# Altium PCB RLC测试仪.PCBDOC
Units mil, origin at the board's own origin, x right, y up, seen from the top; angles counter-clockwise.
Board outline 6000 x 4000 mil, 2 copper layers (Top Layer, Bottom Layer); 44 components, 55 nets, 276 pads, 0 vias.
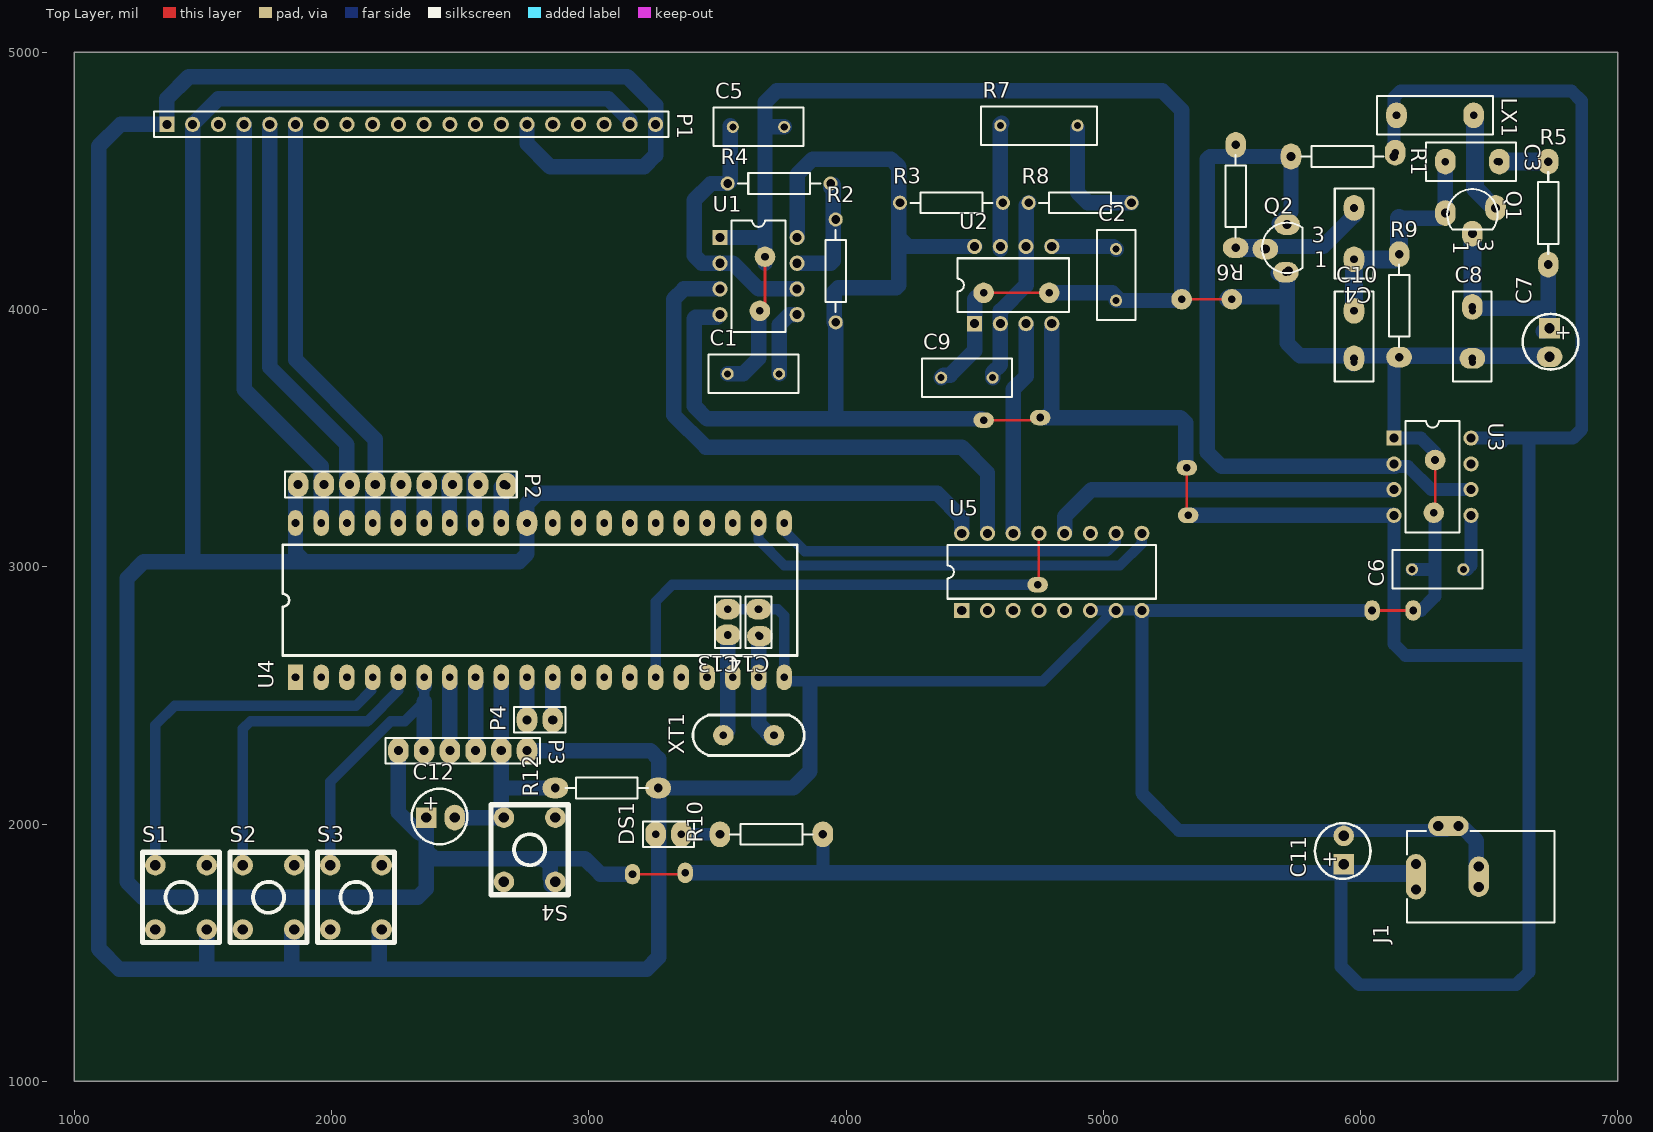
[diagram p0: Top Layer view]
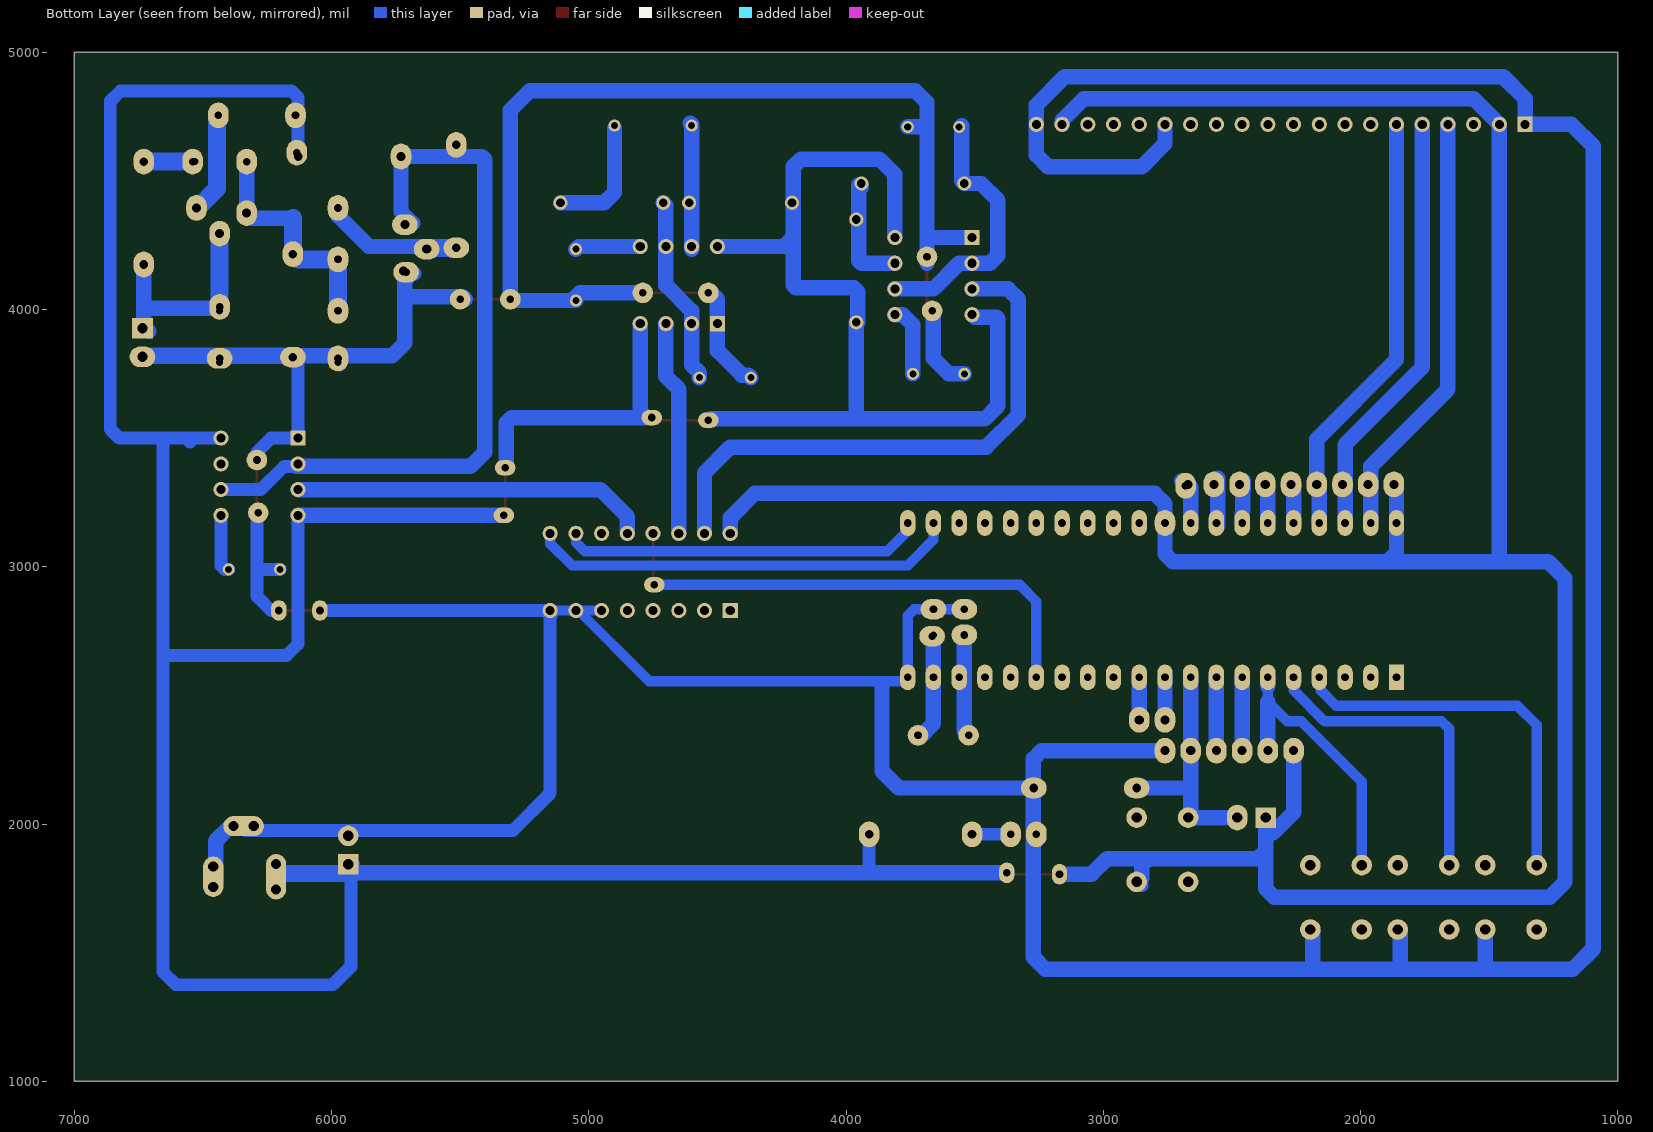
[diagram p1: Bottom Layer view, seen from below]

## Layer stack, top to bottom
Top Solder: solder mask 0.4, Solder Resist, Dk 3.5
Top Layer: signal copper 1.4
Dielectric1: dielectric 12.6, FR-4, Dk 4.8
Bottom Layer: signal copper 1.4
Bottom Solder: solder mask 0.4, Solder Resist, Dk 3.5

## Board outline
1000,1000 7000,1000 7000,5000 1000,5000

## Design rules (kind name [scope] priority, off if disabled: settings)
Clearance [All] p1: gap=10 ignorepadtopadclearanceinfootprint=FALSE except(0: Arc-Hole Track-Hole SMDPad-Hole THPad-Hole Via-Hole Fill-Hole Poly-Hole Region-Hole Text-Hole)
FabricationTestPointUsage TestPointUsage [All] p1: valid=0 allowmultiple=FALSE
FabricationTestpoint Testpoint [All] p1: side=3 testpointundercomponent=TRUE minsize=40 maxsize=100 preferedsize=60 minholesize=0 maxholesize=40 preferedholesize=32 testpointgrid=1 allowsidetop=TRUE allowsidebottom=TRUE usegrid=TRUE gridtolerance=0.01
PolygonConnect [All] p1: connectstyle=Relief reliefconductorwidth=10 reliefentries=4 polygonreliefangle="90 Angle" airgapwidth=10
RoutingVias [All] p1: holewidth=28 width=50 viastyle="Through Hole" minholewidth=28 minwidth=50 maxholewidth=28 maxwidth=50
SolderMaskExpansion [All] p1: expansion=4
Width [All] p1: maxlimit=100 minlimit=10 preferedwidth=50 toplayer_prefwidth=10 minimp=50.000000 maximp=50.000000 favimp=50.000000
28 further rules are at their usual default settings.

## Classes and differential pairs
component class RLC测试仪: C3 C4 C6 C7 C8 C10 C11 C12 C13 C14 DS1 DS2 J1 LX1 P1 P2 P3 P4 Q1 Q2 R1 R5 R6 R8 R9 R10 R11 R12 S1 S3 S4 U2 U3 U4 U5 XT1

## Components (designator, comment, footprint, x,y, rotation, side; value= is the part's Value field where it differs from the comment)
C1 "Cap" RAD-0.2 3640,3750 r180 top
C2 "Cap" RAD-0.2 5050,4135 r270 top
C3 "Cap" RAD-0.2 6430,4575 r0 top
C4 "Cap" RAD-0.2 5975,4295 r270 top
C5 "Cap" RAD-0.2 3660,4710 r180 top
C6 "Cap" RAD-0.2 6300,2990 r180 top
C7 "Cap Pol1" 电容 6715,3875 r270 top
C8 "Cap" RAD-0.2 6435,3895 r90 top
C9 "Cap" RAD-0.2 4470,3735 r0 top
C10 "Cap" RAD-0.2 5975,3895 r90 top
C11 "Cap Pol1" 电容 5955,1895 r90 top
C12 "Cap Pol1" 电容 2420,2005 r0 top
C13 "Cap" RAD-0.1 3540,2785 r270 top
C14 "Cap" RAD-0.1 3660,2785 r270 top
DS1 "LED0" RAD-0.1 3310,1960 r180 top
J1 "PWR2.5" KLD-0202 6755,1795 r180 top
LX1 "Inductor" RAD-0.3 6290,4755 r0 top
P1 "12864" HDR1X20 1360,4720 r0 top
P2 "Header 9" HDR1X9 1870,3320 r0 top
P3 "Header 6H" HDR1X6 2260,2285 r0 top
P4 "Header 2" HDR1X2 2860,2405 r180 top
Q1 "2N3904" BCY-W3/E4#1 6435,4370 r270 top
Q2 "2N3904" BCY-W3/E4#2 5715,4240 r0 top
R1 "Res2" AXIAL-0.4 5930,4595 r0 top
R2 "Res2" AXIAL-0.4 3960,4150 r270 top
R3 "Res2" AXIAL-0.4 4410,4415 r180 top
R4 "Res2" AXIAL-0.4 3740,4490 r0 top
R5 "Res2" AXIAL-0.4 6730,4375 r90 top
R6 "Res2" AXIAL-0.4 5515,4440 r270 top
R7 "Res2" RAD-0.3 4750,4715 r180 top
R8 "Res2" AXIAL-0.4 4910,4415 r180 top
R9 "Res2" AXIAL-0.4 6150,4015 r90 top
R10 "Res2" AXIAL-0.4 3710,1960 r180 top
R12 "Res2" AXIAL-0.4 3070,2140 r180 top
S1 "SW-PB" 点动按键 1145,2000 r180 top
S2 "SW-PB" 点动按键 1485,2000 r180 top
S3 "SW-PB" 点动按键 1825,2000 r180 top
S4 "SW-PB" 点动按键 2500,2185 r180 top
U1 "NE555N" DIP8 3660,4130 r270 top
U2 "NE555N" DIP8 4650,4095 r0 top
U3 "NE555N" DIP8 6280,3350 r270 top
U4 "STC89C52" AT89S52 1860,2570 r90 top
U5 "M74HC4052B1R" DIP16 4800,2980 r0 top
XT1 "12M" 圆晶振 3720,2345 r180 top

## Footprints (in the part's own frame and the unit in brackets; to place one, negate y for a bottom-side part, rotate by r counter-clockwise, add the part's x,y. Pads: shape width x height; smd on the part's side, far side on the other; paste and mask are expansions set on the pad)
AT89S52 [mil]
  rect 100x60 hole 30: 1(0,0)
  oval 100x60 hole 30: 2(0,-100) 3(0,-200) 4(0,-300) 5(0,-400) 6(0,-500) 7(0,-600) 8(0,-700) 9(0,-800) 10(0,-900) 11(0,-1000) 12(0,-1100) 13(0,-1200) 14(0,-1300) 15(0,-1400) 16(0,-1500) 17(0,-1600) 18(0,-1700) 19(0,-1800) 20(0,-1900) 21(600,-1900) 22(600,-1800) 23(600,-1700) 24(600,-1600) 25(600,-1500) 26(600,-1400) 27(600,-1300) 28(600,-1200) 29(600,-1100) 30(600,-1000) 31(600,-900) 32(600,-800) 33(600,-700) 34(600,-600) 35(600,-500) 36(600,-400) 37(600,-300) 38(600,-200) 39(600,-100) 40(600,0)
  silkscreen extent 85,-1950 515,50
AXIAL-0.4 [mm] "Resistor; 2 Leads"
  round 1.4 hole 0.85: 1(-5.08,0) 2(5.08,0)
  silkscreen extent -4.06,-1.02 4.06,1.02
BCY-W3/E4#1 [mm] "TO, Flat Index; 3 In-Line, Axial Leads; Body Dia. 4.7mm"
  oval 2x1 hole 0.9: 1(-0.127,-2.667) 2(1.905,0) 3(-0.635,2.286)
  silkscreen extent -2.48,-2.48 1.5,2.48
BCY-W3/E4#2 [mm] "TO, Flat Index; 3 In-Line, Axial Leads; Body Dia. 4.7mm"
  oval 2x1 hole 0.9: 1(0.127,-2.286) 2(-2.159,-0.127) 3(0,2.286)
  silkscreen extent -2.48,-2.48 1.5,2.48
DIP8 [mm] "DIP; 8 Leads; Row Spacing 7.62 mm; Pitch 2.54 mm"
  rect 1.5x1.5 hole 0.9: 1(-3.81,-3.81)
  round 1.5 hole 0.9: 2(-1.27,-3.81) 3(1.27,-3.81) 4(3.81,-3.81) 5(3.81,3.81) 6(1.27,3.81) 7(-1.27,3.81) 8(-3.81,3.81)
  silkscreen extent -5.5,-2.65 5.5,2.65
DIP16 [mm] "DIP; 16 Leads; Row Spacing 7.62 mm; Pitch 2.54 mm"
  rect 1.5x1.5 hole 0.9: 1(-8.89,-3.81)
  round 1.5 hole 0.9: 2(-6.35,-3.81) 3(-3.81,-3.81) 4(-1.27,-3.81) 5(1.27,-3.81) 6(3.81,-3.81) 7(6.35,-3.81) 8(8.89,-3.81) 9(8.89,3.81) 10(6.35,3.81) 11(3.81,3.81) 12(1.27,3.81) 13(-1.27,3.81) 14(-3.81,3.81) 15(-6.35,3.81) 16(-8.89,3.81)
  silkscreen extent -10.3,-2.65 10.3,2.65
HDR1X2 [mm] "Connector; Header; 2 Position"
  rect 1.5x1.5 hole 0.9: 1(0,0)
  round 1.5 hole 0.9: 2(2.54,0)
  silkscreen extent -1.27,-1.27 3.81,1.27
HDR1X6 [mm] "Connector; Header; 6 Position"
  rect 1.5x1.5 hole 0.9: 1(0,0)
  round 1.5 hole 0.9: 2(2.54,0) 3(5.08,0) 4(7.62,0) 5(10.16,0) 6(12.7,0)
  silkscreen extent -1.27,-1.27 13.97,1.27
HDR1X9 [mm] "Connector; Header; 9 Position"
  rect 1.5x1.5 hole 0.9: 1(0,0)
  round 1.5 hole 0.9: 2(2.54,0) 3(5.08,0) 4(7.62,0) 5(10.16,0) 6(12.7,0) 7(15.24,0) 8(17.78,0) 9(20.32,0)
  silkscreen extent -1.27,-1.27 21.59,1.27
HDR1X20 [mm] "Connector; Header; 20 Position"
  rect 1.5x1.5 hole 0.9: 1(0,0)
  round 1.5 hole 0.9: 2(2.54,0) 3(5.08,0) 4(7.62,0) 5(10.16,0) 6(12.7,0) 7(15.24,0) 8(17.78,0) 9(20.32,0) 10(22.86,0) 11(25.4,0) 12(27.94,0) 13(30.48,0) 14(33.02,0) 15(35.56,0) 16(38.1,0) 17(40.64,0) 18(43.18,0) 19(45.72,0) 20(48.26,0)
  silkscreen extent -1.27,-1.27 49.53,1.27
KLD-0202 [mm] "DC Power Jack, 2.5mm, KLD Series, PCB Mount"
  oval 2x4.5 all layers, no hole: 1(13.7,0)
  round 1.5 hole 1: 1A(13.7,-1.25) 1B(13.7,1.25) 2A(7.5,-1) 2B(7.5,1) 3A(9.5,-5) 3B(11.5,-5)
  oval 2x4 all layers, no hole: 2(7.5,0)
  oval 4x2 all layers, no hole: 3(10.5,-5)
  silkscreen extent 0,-4.5 14.6,4.5
RAD-0.1 [mm] "Indicating Instrument; 2 Leads"
  round 1.2 hole 0.7: 1(-1.27,0) 2(1.27,0)
  silkscreen extent -2.54,-1.27 2.54,1.27
RAD-0.2 [mm] "Jumper Wire; 2 Leads"
  round 1.2 hole 0.7: 1(-2.54,0) 2(2.54,0)
  silkscreen extent -4.44,-1.91 4.44,1.91
RAD-0.3 [mm] "Capacitor; 2 Leads"
  round 1.2 hole 0.7: 1(-3.81,0) 2(3.81,0)
  silkscreen extent -5.71,-1.91 5.71,1.91
圆晶振 [mil]
  round 80 hole 30: 1(0,0) 2(196.85,0)
  silkscreen extent -118,-79 315,79
点动按键 [mil]
  round 80 hole 40: 1(-370,410) 2(-170,160) 3(-370,160) 4(-170,410)
  silkscreen extent -420,110 -120,460
电容 [mil]
  rect 80x80 hole 40: 1(-52,20)
  round 80 hole 40: 2(59,20)
  silkscreen extent -108,-84 108,132

## Part data
C1 C2 C3 C4 C5 C6 C8 C9 C10 C13 C14: "Capacitor"
C7 C11 C12: "Polarized Capacitor (Radial)"
DS1: "Typical INFRARED GaAs LED"
J1: "Low Voltage Power Supply Connector"
P2: "Header, 9-Pin"
P3: "Header, 6-Pin, Right Angle"
P4: "Header, 2-Pin"
Q1 Q2: "NPN General Purpose Amplifier"
R1 R2 R3 R4 R5 R6 R7 R8 R9 R10 R12: "Resistor"
S1 S2 S3 S4: "Switch"
U1 U2 U3: "General-Purpose Single Bipolar Timer"
U4: library part AT89S52
U5: "Analog Multiplexer/Demultiplexer Dual 4-Channel"
XT1: library part XTAL2

## Free pads (board coordinates)
  round 80 hole 30: 0(4535,4065) 1(4790,4065) 2(5305,4040) 3(5500,4040) 4(3685,4205) 5(3665,3995) 6(6290,3415) 7(6285,3210)
  oval 80x100 hole 30: 3(3260,1960) 4(3360,1960) 5(3510,1960) 6(3910,1960) 11(6730,4175) 12(6435,4010) 13(6435,4295) 14(6330,4375) 15(6525,4395) 16(6540,4575) 17(6730,4575) 18(6440,4755) 19(6140,4755) 20(6135,4610) 21(6330,4575) 22(6150,4215) 23(5975,3995) 24(5975,4195) 25(5975,4395) 26(5730,4595) 27(5515,4640) 36(5975,3810) 42(1870,3320) 43(1970,3320) 44(2070,3320) 45(2170,3320) 46(2270,3320) 47(2370,3320) 48(2470,3320) 49(2470,3320) 50(2570,3320) 51(2680,3315) 52(2760,3170) 59(2760,2285) 60(2660,2285) 61(2760,2405) 62(2860,2405) 63(2560,2285) 64(2460,2285) 65(2360,2285) 66(2260,2285) 68(2479,2025)
  oval 80x60 hole 30: 8(4745,2930) 9(4535,3570) 10(4755,3580) 11(5325,3385) 12(5330,3200)
  oval 100x80 hole 30: 9(6435,3810) 10(6735,3816) 28(5715,4330) 29(5630,4235) 30(5515,4240) 31(5710,4145) 35(6150,3815) 53(3540,2835) 54(3660,2835) 55(3540,2735) 56(3665,2730) 57(3270,2140) 58(2870,2140)
  oval 60x80 hole 30: 13(3170,1805) 14(3375,1810) 15(6045,2830) 16(6205,2830)

## Nets (pads, with @x,y where several pads share a name; then routed paths per layer and width w, separated by ;. In a path a pad name is that pad's centre, name@x,y a point inside that pad or via, vN(x,y) a via of type N, cw(c..) or ccw(c..) an arc to the next point about the centre after c; other vN are vias at no path point)
ALE: U4.30
FC: U1.3 U5.15 | length 2194.8
  Bottom Layer w60: U1.3 3370,4080 3330,4040 3330,3590 3455,3465 4450,3465 4550,3365 U5.15
FL: U3.3 U5.12 | length 1388.5
  Bottom Layer w60: U5.12 4850,3195 4955,3300 U3.3
FR: U2.3 U5.14 | length 835.7
  Bottom Layer w60: U5.14 4650,3690 4700,3740 U2.3
GND: C1.2 C2.2 C5.1 C6.2 C7.2 C8.1 C9.1 C10.1 C11.2 C13.1 C14.1 DS1.2 J1.2 J1.2A J1.2B J1.3 J1.3A J1.3B P1.1 P1.15 P1.20 P3.6 pad.0 pad.1 pad.2 pad.3 pad.4@3685,4205 pad.5@3665,3995 pad.6@6290,3415 pad.7 pad.9@6435,3810 pad.10@6735,3816 pad.15@6045,2830 pad.16@6205,2830 pad.31 pad.35 pad.36 pad.53 pad.54 pad.57 pad.59 Q2.1 R9.1 R12.1 S1.1 S2.1 S3.1 U1.1 U2.1 U3.1 U4.20 U5.6 U5.7 U5.8 | length 24580
  Top Layer w10: pad.5@3665,3995 3685,4015 pad.4@3685,4205 ; pad.0 pad.1 ; pad.2 pad.3@5500,4040 ; pad.15@6045,2830 pad.16@6185,2830 ; pad.7@6290,3215 pad.6@6290,3415
  Bottom Layer w40: pad.53 pad.54 3735,2835 3760,2810 U4.20 ; U4.20@3760,2555 4765,2555 U5.7@5040,2830 ; U5.6 U5.7@5040,2830 ; U5.8 U5.7 U5.7@5040,2830
  Bottom Layer w50: U5.8@5150,2815 5150,2120 5295,1975 J1.3@6335,1975 ; U5.8 pad.15@6045,2830 ; pad.35@6140,3805 6130,3795 U3.1 6235,3500 6290,3445 6290,3415 pad.6@6290,3410 ; C6.2 6275,2990 6290,3005 ; pad.16@6205,2830 6235,2830 6290,2885 6290,3005 ; pad.7@6290,3215 6290,3005
  Bottom Layer w60: 1515,1465 S1.1 ; 1845,1460 S2.1@1845,1585 ; S2.1@1855,1585 S2.1 ; 2185,1460 S3.1@2185,1585 ; pad.59 3240,2285 3271.89,2253.11 DS1.2@3271.89,1971.89 ; P1.15 2760,4645 2850,4555 3215,4555 3260,4600 P1.20 3260,4795 3150,4905 1445,4905 1360,4820 P1.1 1180,4720 1095,4635 1095,1515 1175,1435 3225,1435 3271.89,1481.89 DS1.2@3271.89,1971.89 ; DS1.2 DS1.2@3271.89,1971.89 ; pad.57@3280,2140 3795,2140 3860,2205 3860,2535 ; U1.1 3675,4280 3685,4290 ; C1.2 3600,3750 3660,3810 pad.5@3660,3990 ; pad.4@3685,4180 3685,4205 3685,4290 ; C5.1 3690,4710 3685,4705 ; C9.1 4380,3745 4405,3745 4500,3840 U2.1 4500,4040 4525,4065 pad.0 ; pad.1@4785,4065 pad.1 5035,4065 5050,4050 C2.2 5315,4035 5305,4045 5305,4775 5230,4850 3730,4850 3685,4805 3685,4705 ; U5.8@5150,2815 U5.8 ; pad.3@5480,4040 5490,4050 5715,4050 ; pad.31@5680,4140 5709.41,4147.35 Q2.1 ; pad.31@5710,4115 5715,4110 5715,4050 ; pad.36@5970,3790 C10.1 ; pad.35@6190,3820 5990,3820 5765,3820 5715,3870 5715,4050 ; J1.3@6400,1985 6450,1935 J1.2@6450,1785 ; 3685,4290 3685,4705
  Bottom Layer w65: pad.35@6190,3820 6735,3820 pad.10@6745,3820
  Bottom Layer w70: pad.36@5980,3810 pad.36@5990,3820
NetC1_1: C1.1 U1.5 | length 276.6
  Bottom Layer w60: C1.1 3740,3940 3780,3980 U1.5
NetC2_1: C2.1 U2.5 | length 254.1
  Bottom Layer w60: U2.5 5040,4245 C2.1
NetC3_1: C3.1 C4.2 C10.2 pad.14@6330,4375 pad.21 pad.22 pad.23 pad.24 Q1.1 R9.2 | length 901.6
  Bottom Layer w60: 6160,4355 6310,4355 Q1.1 pad.21
  Bottom Layer w70: pad.23 pad.24 6130,4195 pad.22 6150,4355
NetC3_2: C3.2 pad.16@6540,4575 pad.17 R5.2 | length 345
  Bottom Layer w60: pad.16@6550,4575 pad.17@6715,4575
  Bottom Layer w70: pad.16@6550,4575 pad.17
NetC4_1: C4.1 pad.25 pad.29 pad.30 Q2.2 R6.2 | length 663.8
  Bottom Layer w60: pad.29@5655,4235 5525,4235 5535,4245 5855,4245 5975,4365 pad.25
NetC5_2: C5.2 R4.1 U1.2 U1.6 | length 1054.9
  Bottom Layer w60: C5.2@3550,4715 3550,4500 R4.1 3475,4490 3410,4425 3410,4210 3440,4180 3560,4180 3660,4080 U1.6
NetC6_1: C6.1 U3.5 | length 231.2
  Bottom Layer w50: C6.1 6415,2990 6430,3005 U3.5
NetC7_1: C7.1 C8.2 pad.11@6730,4175 pad.12@6435,4010 pad.13@6435,4295 Q1.2 R5.1 | length 852.4
  Bottom Layer w60: pad.12@6440,4005 6725,4005 6730,4010 ; C7.1@6710,3915 6730,3935 R5.1
  Bottom Layer w70: Q1.2 6435,4010 pad.12@6440,4005
NetC9_2: C9.2 R8.2 U2.2 U2.6 | length 738
  Bottom Layer w60: C9.2 4570,3755 4600,3785 4600,3995 4700,4095 4700,4405 R8.2
NetDS1_1: DS1.1 pad.4@3360,1960 pad.5@3510,1960 R10.2 | length 150
  Bottom Layer w50: DS1.1 R10.2
NetDS2_1: 
NetLX1_2: LX1.2 pad.15@6525,4395 pad.18 Q1.3 | length 398.1
  Bottom Layer w70: pad.18 6445,4750 6445,4470 6520,4395 Q1.3
NetQ2_3: pad.26 pad.27 pad.28 Q2.3 R1.1 R6.1 U3.2 U3.6 | length 2847.8
  Bottom Layer w50: U3.2@6135,3390 6185,3390 6275,3300 U3.6
  Bottom Layer w60: pad.27@5515,4625 pad.27 ; pad.28@5685,4335 5730,4380 pad.26 5415,4595 5405,4585 5405,3445 5460,3390 U3.2@6135,3390
NetR2_1: R2.1 R4.2 U1.7 | length 458.3
  Bottom Layer w60: U1.7 3940,4180 3950,4190 R4.2@3950,4485 ; R4.2@3940,4480 3940,4475 R4.2@3950,4465
NetR3_1: R3.1 R7.2 U2.7 | length 492.1
  Bottom Layer w60: U2.7@4600,4235 4600,4720 R7.2@4605,4725
NetR7_1: R7.1 R8.1 | length 476.6
  Bottom Layer w60: R7.1@4900,4705 4900,4455 4940,4415 R8.1
P00: P1.4 P2.2 pad.43 U4.39 | length 1688.4
  Bottom Layer w60: P1.4 1660,3690 1960,3390 U4.39 ; pad.43@1960,3310 pad.43
P01: P1.5 P2.3 pad.44 U4.38 | length 1688.4
  Bottom Layer w60: P1.5 1760,3775 2060,3475 U4.38 ; pad.44@2060,3310 pad.44
P02: P1.6 P2.4 pad.45 U4.37 | length 1675.5
  Bottom Layer w60: P1.6 1860,3805 2170,3495 pad.45 ; U4.37 2160,3310 pad.45@2165,3315
P03: P2.5 pad.46 U4.36 | length 154.1
  Bottom Layer w60: U4.36 2260,3310 pad.46
P04: P2.6 pad.47 U4.35 | length 154.1
  Bottom Layer w60: U4.35 2360,3310 pad.47
P05: P2.7 pad.48 pad.49 U4.34 | length 179.2
  Bottom Layer w60: pad.49@2455,3335 U4.34 ; pad.49@2460,3310 pad.49
P06: P2.8 pad.50 U4.33 | length 199.1
  Bottom Layer w60: U4.33@2555,3160 pad.50@2555,3345 ; pad.50@2560,3310 pad.50
P07: P2.9 pad.51 U4.32 | length 195.2
  Bottom Layer w60: U4.32 2660,3305 pad.51@2695,3335 ; pad.51@2660,3310 P2.9
P10: U4.1
P11: U4.2
P12: U4.3
P13: S1.2 U4.4 | length 1475.9
  Bottom Layer w40: S1.2 1315,2385 1390,2460 2095,2460 2155,2520 U4.4@2155,2555
P14: S2.2 U4.5 | length 1232.1
  Bottom Layer w40: S2.2 1655,2370 1685,2400 2140,2400 2260,2520 U4.5@2260,2555
P15: P3.2 pad.65 S3.2 U4.6 | length 1103.4
  Bottom Layer w40: S3.2 1995,2165 2230,2400 2285,2400 2360,2475 U4.6@2360,2535
  Bottom Layer w60: pad.65 2360,2475 ; U4.6@2360,2535 U4.6
P16: P3.3 pad.64 U4.7 | length 285
  Bottom Layer w60: pad.64 U4.7
P17: P3.4 pad.63 U4.8 | length 285
  Bottom Layer w60: pad.63 U4.8
P20: U4.21 U5.10 | length 1406.8
  Bottom Layer w40: U4.21@3750,3170 3750,3150 3840,3060 5015,3060 5050,3095 U5.10
P21: U4.22 U5.9 | length 1671.6
  Bottom Layer w40: U4.22 3660,3105 3760,3005 5065,3005 5150,3090 U5.9
P22: U4.23
P23: U4.24
P24: U4.25
P25: U4.26
P26: U4.27
P27: U4.28
P30: P4.2 pad.61 U4.10 | length 165
  Bottom Layer w60: pad.61 U4.10
P31: P4.1 pad.62 U4.11 | length 165
  Bottom Layer w60: pad.62 U4.11
P33: U4.13
P34: U4.14
P35: pad.8 U4.15 U5.13 | length 2011.9
  Top Layer w10: pad.8@4750,2925 U5.13
  Bottom Layer w40: U4.15 3260,2865 3325,2930 pad.8
PSEN: U4.29
RST: C12.2 P3.5 pad.58 pad.60 pad.68 R12.2 S4.2 U4.9 | length 945.1
  Bottom Layer w60: pad.68 S4.2@2660,2025 ; S4.2@2655,2020 S4.2@2660,2025 ; 2660,2145 2665,2140 pad.58 ; U4.9 S4.2@2660,2025
VCC: C11.1 C12.1 J1.1 J1.1A J1.1B LX1.1 P1.2 P1.19 P2.1 P3.1 pad.6@3910,1960 pad.9@4535,3570 pad.10@4755,3580 pad.11@5325,3385 pad.12@5330,3200 pad.13@3170,1805 pad.14@3375,1810 pad.19 pad.20 pad.42 pad.52 pad.66 R1.2 R2.2 R3.2 R10.1 S4.1 U1.4 U1.8 U2.4 U2.8 U3.4 U3.8 U4.31 U4.40 U5.16 | length 27883.8
  Top Layer w10: pad.13@3170,1805 pad.14@3385,1805 ; pad.9@4535,3570 pad.10@4750,3570 ; pad.12@5325,3215 pad.11@5325,3385
  Bottom Layer w50: S4.1@2850,1760 S4.1@2850,1790 ; 3910,1810 R10.1 ; C11.1@5915,1840 C11.1@5915,1845 ; C11.1@5925,1810 5925,1445 5995,1375 6605,1375 6655,1425 6655,3495 ; U3.4 6130,2700 6175,2655 6635,2655 ; pad.20@6130,4610 6130,4825 6155,4850 6820,4850 6860,4810 6860,3535 6825,3500 6535,3500 ; U3.8 6535,3500 ; 6550,3485 6535,3500
  Bottom Layer w60: 1460,3050 P1.2 1560,4820 3075,4820 3160,4735 P1.19 ; pad.42 1860,3310 U4.40 1860,3055 1895,3020 ; pad.66@2250,2295 pad.66@2255,2290 ; pad.66 2260,2045 2340,1965 2368,1965 ; C12.1 2368,1965 ; S4.1@2865,1775 2850,1790 2850,1840 2825,1865 ; pad.13@3170,1805 3045,1805 2985,1865 2825,1865 ; pad.14@3375,1810 3910,1810 5925,1810 C11.1@5950,1810 ; U1.4@3500,3970 3415,3970 3410,3965 3410,3625 3460,3575 pad.9@4525,3575 ; U1.8 3810,4525 3870,4585 4175,4585 4205,4555 4205,4280 ; R2.2@3955,3950 3955,4070 3970,4085 4195,4085 4205,4095 4205,4280 ; 3960,3585 R2.2 ; U5.16 4450,3190 4355,3285 2800,3285 2760,3245 pad.52 2760,3050 2730,3020 1895,3020 ; U2.8 4240,4245 4205,4280 ; pad.10@4755,3580 pad.10@4775,3580 ; U2.4 4800,3605 pad.10@4775,3580 ; pad.12@5320,3200 5330,3200 U3.4 ; pad.11@5320,3410 5320,3560 5300,3580 pad.10@4775,3580 ; C11.1@5940,1820 C11.1@5950,1810 ; J1.1@6200,1820 6190,1810 C11.1@5950,1810 ; J1.1@6215,1805 5955,1805 C11.1@5950,1810 ; 1895,3020 1270,3020 1205,2955 1205,1775 1265,1715 2335,1715 2368,1748 2368,1897 ; 2368,1897 2368,1965 ; 2368,1897 2400,1865 2825,1865
XT1: C14.2 pad.56 U4.19 XT1.1 | length 432.8
  Bottom Layer w60: C14.2 3660,2390 3715,2335 XT1.1@3725,2335
XT2: C13.2 pad.55 U4.18 XT1.2 | length 397
  Bottom Layer w60: XT1.2 3540,2361.85 pad.55
pads on no net: P1.3 P1.7 P1.8 P1.9 P1.10 P1.11 P1.12 P1.13 P1.14 P1.16 P1.17 P1.18 S1.3 S1.4 S2.3 S2.4 S3.3 S3.4 S4.3 S4.4 U3.7 U4.12 U4.16 U4.17 U5.1 U5.2 U5.3 U5.4 U5.5 U5.11

## Text inside footprints (layer, text, board x,y; h text height)
C7: Top Overlay "+" at 6765,3942 h60 r270
C11: Top Overlay "+" at 5905,1828 h60 r90
C12: Top Overlay "+" at 2353,2055 h60
J1: Mechanical 1 "Mech 2 - Clearance, move to internal plane if present" at 6743.74,1595.56 h11.81 r180; Mechanical 1 "Mech 1 - Slot cut-out" at 6743.74,1575.87 h11.81 r180; Mechanical 1 "Assign keep-out area to slot" at 7070,1595 h11.81 r180; Mechanical 1 "Alert PCB fab to slot details" at 6743.74,1556.18 h11.81 r180
Q1: Top Overlay "3" at 6455.08,4274.33 h59.05 r270; Top Overlay "1" at 6360.2,4265.28 h59.05 r270
Q2: Top Overlay "3" at 5810.67,4260.08 h59.05; Top Overlay "1" at 5819.72,4165.2 h59.05